# EAGLE board headstage (EAGLE 6.5.0), part 1 of 2
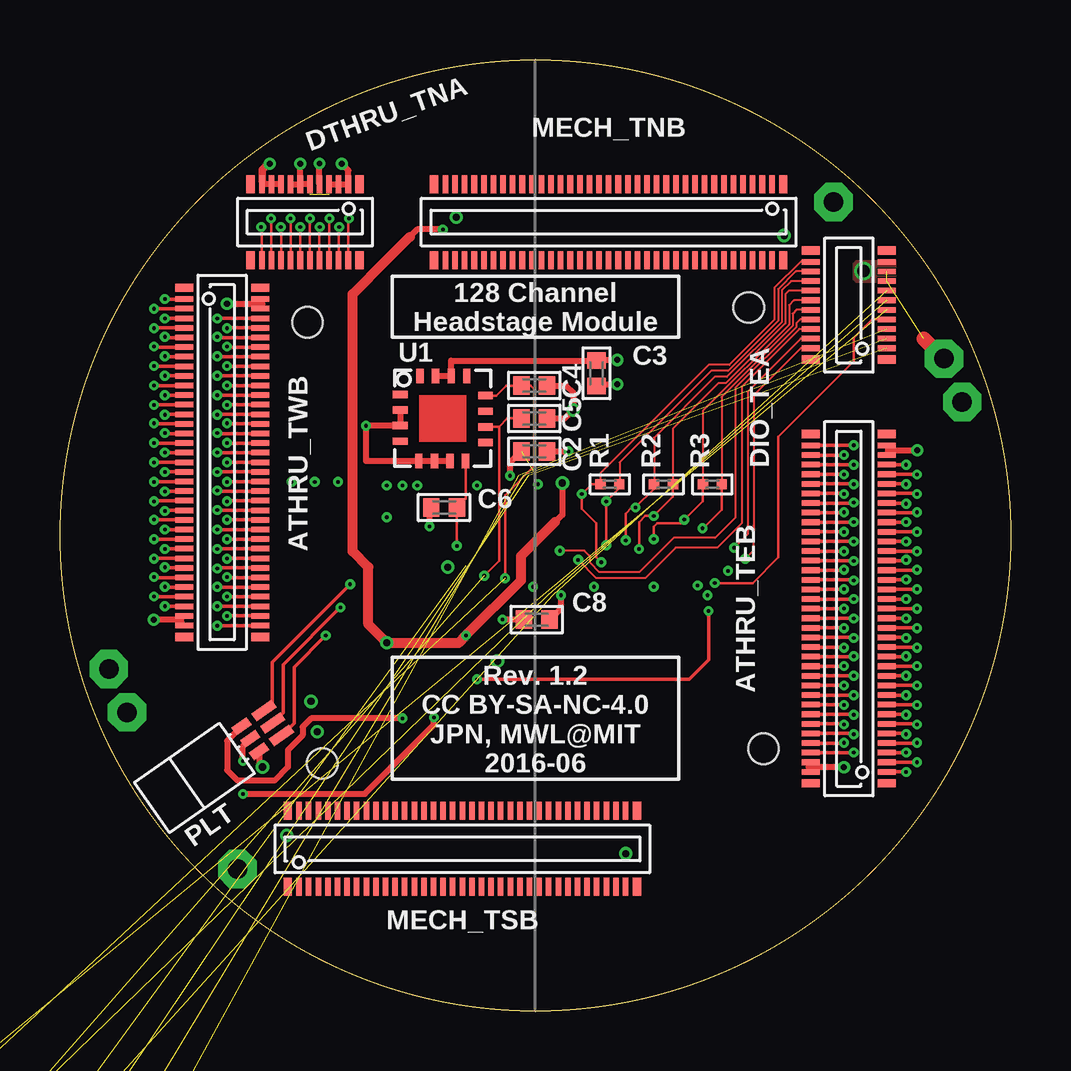
[diagram p0: board, top side]
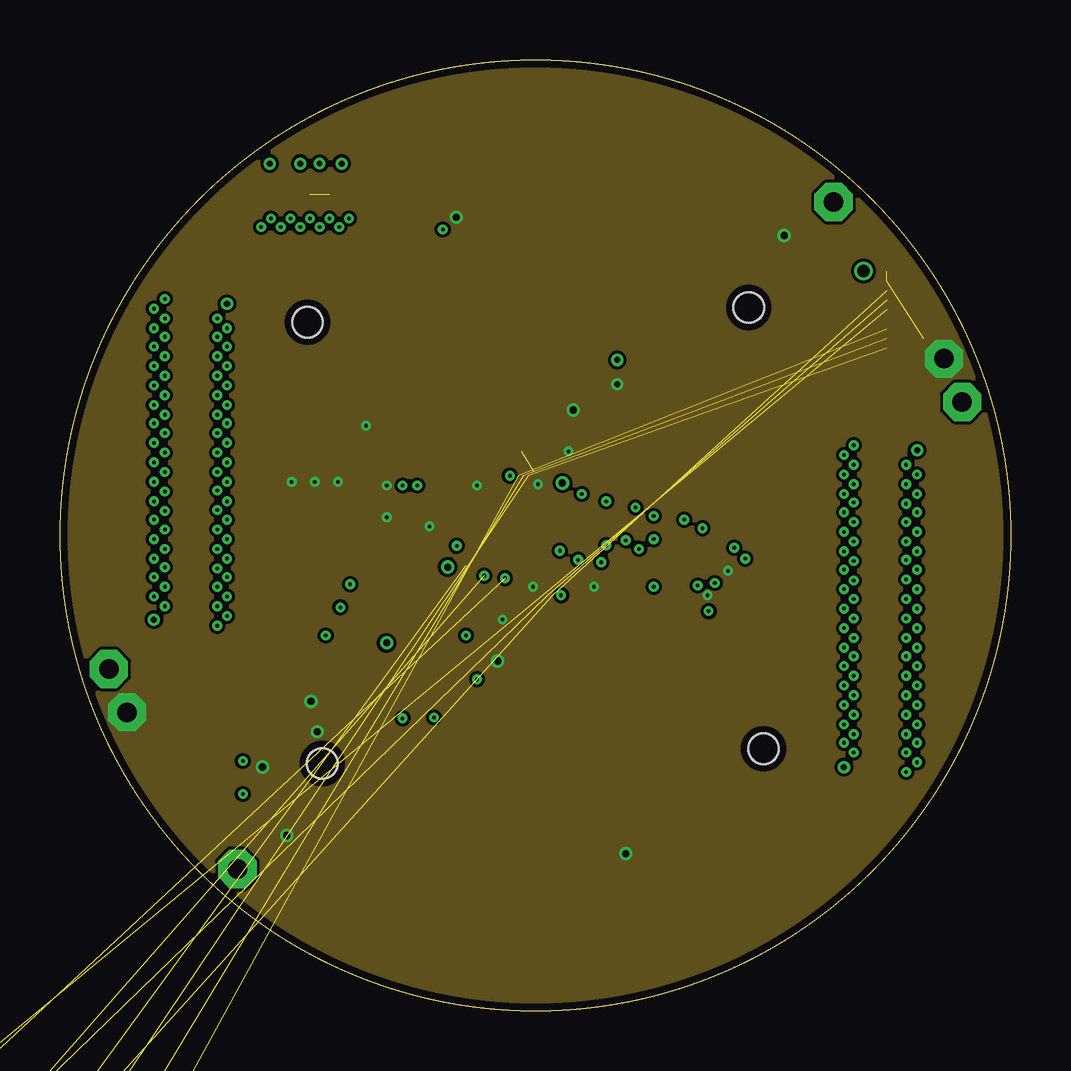
[diagram p1: board, inner layer Route2]
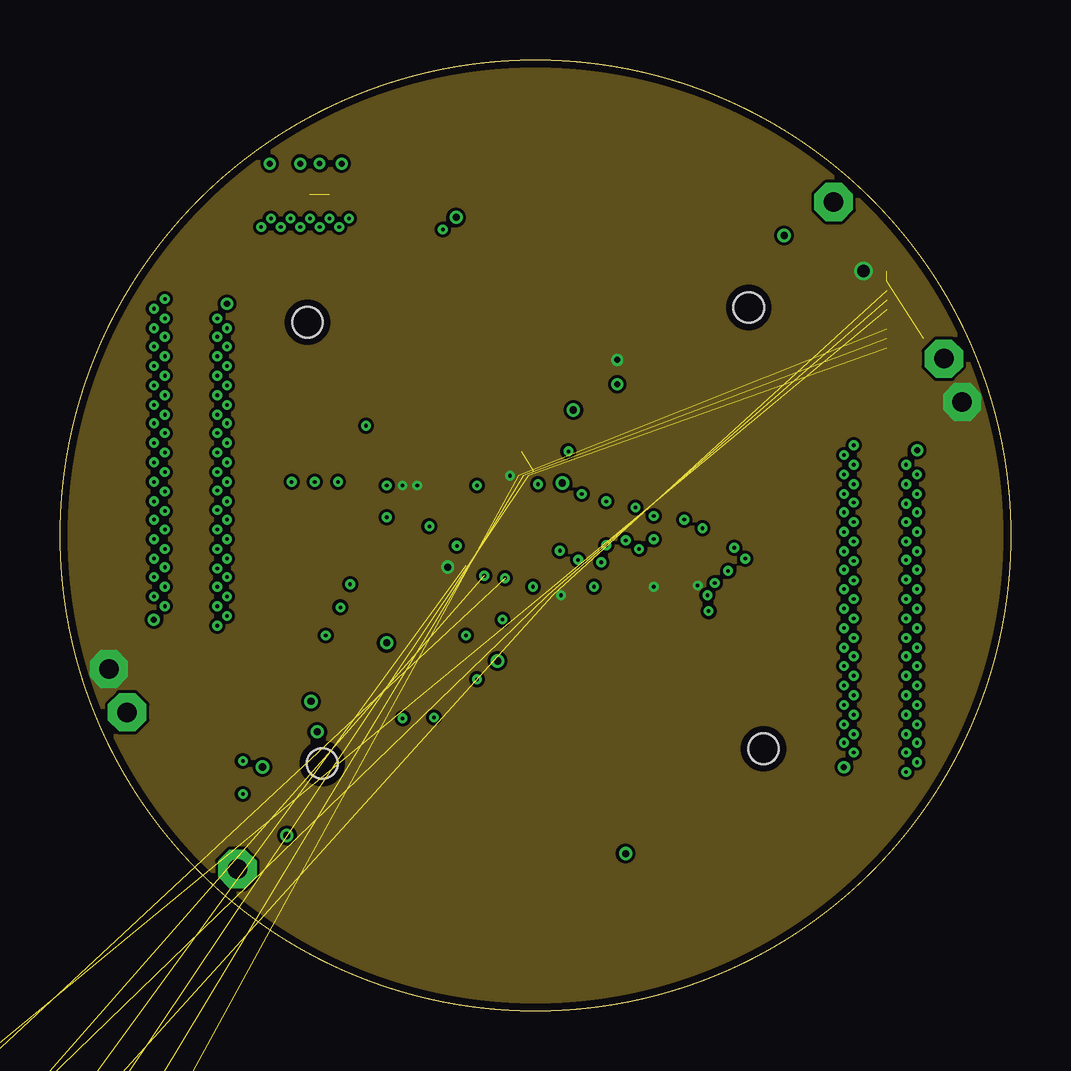
[diagram p2: board, inner layer Route3]
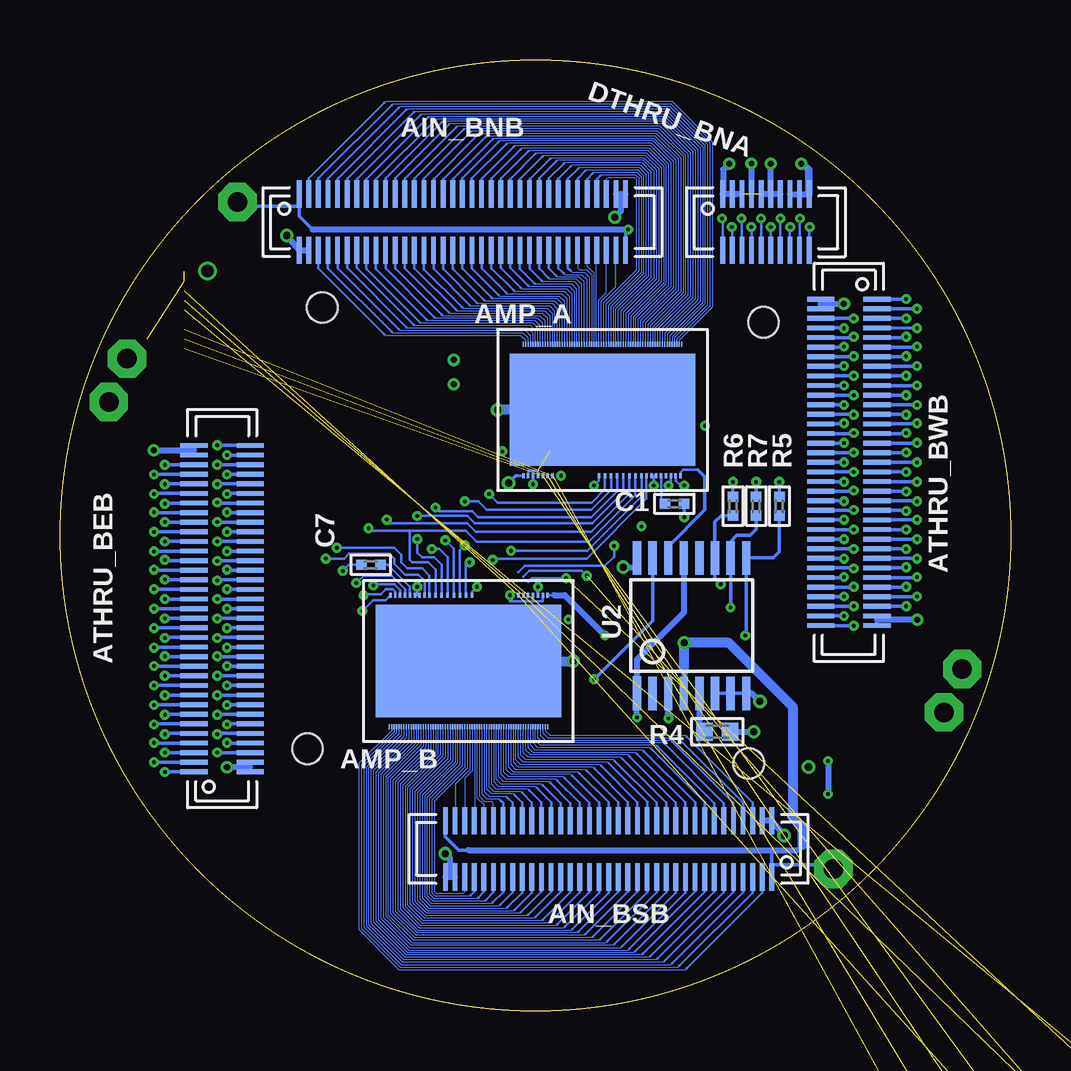
[diagram p3: board, bottom side, seen from below]

Size 39.62 x 39.62 mm. Coordinates in mm from the lower left corner, seen from the top.
Outline: circle at 19.81,19.81 radius 19.81
Copper layers (1*2+3*16): Top 0.035mm / dielectric 1.5mm / Route2 0.035mm / dielectric 0.15mm / Route3 0.035mm / dielectric 0.2mm / Bottom 0.035mm
Design rules "Precision-Image": minimum track width 2mil, minimum drill 6mil, track to track 2mil, track to pad 2mil, pad to pad 2mil, via to via 2mil, smd to smd 2mil, copper to edge 12mil, drill to drill 15mil, minimum pad ring 5mil, minimum via ring 5mil, stop-mask expansion 2mil, vias tented up to drill 20mil, thermal gap 10mil
Net classes: 1 thick: width 0.102 mm
Holes 1.27 mm at 10.31,28.7 28.7,29.31 29.31,10.92 10.92,10.31

## Footprints (pad centres in the part's own frame; a part is rotated, then mirrored left to right if it is on the bottom)
DF40-70REC = smd 0.2 x 1.14: 1 -6.8,1.17; 2 -6.4,1.17; 3 -6,1.17; 4 -5.6,1.17; 5 -5.2,1.17; 6 -4.8,1.17; 7 -4.4,1.17; 8 -4,1.17; 9 -3.6,1.17; 10 -3.2,1.17; 11 -2.8,1.17; 12 -2.4,1.17; 13 -2,1.17; 14 -1.6,1.17; 15 -1.2,1.17; 16 -0.8,1.17; 17 -0.4,1.17; 18 0,1.17; 19 0.4,1.17; 20 0.8,1.17; 21 1.2,1.17; 22 1.6,1.17; 23 2,1.17; 24 2.4,1.17; 25 2.8,1.17; 26 3.2,1.17; 27 3.6,1.17; 28 4,1.17; 29 4.4,1.17; 30 4.8,1.17; 31 5.2,1.17; 32 5.6,1.17; 33 6,1.17; 34 6.4,1.17; 35 6.8,1.17; 36 6.8,-1.17; 37 6.4,-1.17; 38 6,-1.17; 39 5.6,-1.17; 40 5.2,-1.17; 41 4.8,-1.17; 42 4.4,-1.17; 43 4,-1.17; 44 3.6,-1.17; 45 3.2,-1.17; 46 2.8,-1.17; 47 2.4,-1.17; 48 2,-1.17; 49 1.6,-1.17; 50 1.2,-1.17; 51 0.8,-1.17; 52 0.4,-1.17; 53 0,-1.17; 54 -0.4,-1.17; 55 -0.8,-1.17; 56 -1.2,-1.17; 57 -1.6,-1.17; 58 -2,-1.17; 59 -2.4,-1.17; 60 -2.8,-1.17; 61 -3.2,-1.17; 62 -3.6,-1.17; 63 -4,-1.17; 64 -4.4,-1.17; 65 -4.8,-1.17; 66 -5.2,-1.17; 67 -5.6,-1.17; 68 -6,-1.17; 69 -6.4,-1.17; 70 -6.8,-1.17
RHD2164_COB = smd 0.051 x 0.203: 0 -3.2,2.743; 1 -3.099,2.743; 2 -2.997,2.743; 3 -2.896,2.743; 4 -2.794,2.743; 5 -2.692,2.743; 6 -2.591,2.743; 7 -2.489,2.743; 8 -2.388,2.743; 9 -2.286,2.743; 10 -2.184,2.743; 11 -2.083,2.743; 12 -1.981,2.743; 13 -1.88,2.743; 14 -1.778,2.743; 15 -1.676,2.743; 16 -1.575,2.743; 17 -1.473,2.743; 18 -1.372,2.743; 19 -1.27,2.743; 20 -1.168,2.743; 21 -1.067,2.743; 22 -0.965,2.743; 23 -0.864,2.743; 24 -0.762,2.743; 25 -0.66,2.743; 26 -0.559,2.743; 27 -0.457,2.743; 28 -0.356,2.743; 29 -0.254,2.743; 30 -0.152,2.743; 31 -0.051,2.743; 32 0.051,2.743; 33 0.152,2.743; 34 0.254,2.743; 35 0.356,2.743; 36 0.457,2.743; 37 0.559,2.743; 38 0.66,2.743; 39 0.762,2.743; 40 0.864,2.743; 41 0.965,2.743; 42 1.067,2.743; 43 1.168,2.743; 44 1.27,2.743; 45 1.372,2.743; 46 1.473,2.743; 47 1.575,2.743; 48 1.676,2.743; 49 1.778,2.743; 50 1.88,2.743; 51 1.981,2.743; 52 2.083,2.743; 53 2.184,2.743; 54 2.286,2.743; 55 2.388,2.743; 56 2.489,2.743; 57 2.591,2.743; 58 2.692,2.743; 59 2.794,2.743; 60 2.896,2.743; 61 2.997,2.743; 62 3.099,2.743; 63 3.2,2.743; A -3.302,2.743; B 3.302,2.743 | smd 0.102 x 0.203: B1 -3.302,-2.743; B2 -3.099,-2.743; B3 -2.896,-2.743; B4 -2.692,-2.743; B5 -2.489,-2.743; B6 -2.286,-2.743; B7 -2.083,-2.743; B8 -0.152,-2.743; B9 0.102,-2.743; B10 0.356,-2.743; B11 0.61,-2.743; B12 0.864,-2.743; B13 1.118,-2.743; B14 1.372,-2.743; B15 1.626,-2.743; B16 1.829,-2.743; B17 2.032,-2.743; B18 2.235,-2.743; B19 2.438,-2.743; B20 2.642,-2.743; B21 2.845,-2.743; B22 3.048,-2.743; B23 3.251,-2.743 | smd 7.722 x 4.674: CENTER 0,0
DF40-70HEAD = smd 0.23 x 0.75: 1 -6.8,-1.585; 2 -6.4,-1.585; 3 -6,-1.585; 4 -5.6,-1.585; 5 -5.2,-1.585; 6 -4.8,-1.585; 7 -4.4,-1.585; 8 -4,-1.585; 9 -3.6,-1.585; 10 -3.2,-1.585; 11 -2.8,-1.585; 12 -2.4,-1.585; 13 -2,-1.585; 14 -1.6,-1.585; 15 -1.2,-1.585; 16 -0.8,-1.585; 17 -0.4,-1.585; 18 0,-1.585; 19 0.4,-1.585; 20 0.8,-1.585; 21 1.2,-1.585; 22 1.6,-1.585; 23 2,-1.585; 24 2.4,-1.585; 25 2.8,-1.585; 26 3.2,-1.585; 27 3.6,-1.585; 28 4,-1.585; 29 4.4,-1.585; 30 4.8,-1.585; 31 5.2,-1.585; 32 5.6,-1.585; 33 6,-1.585; 34 6.4,-1.585; 35 6.8,-1.585; 36 6.8,1.585; 37 6.4,1.585; 38 6,1.585; 39 5.6,1.585; 40 5.2,1.585; 41 4.8,1.585; 42 4.4,1.585; 43 4,1.585; 44 3.6,1.585; 45 3.2,1.585; 46 2.8,1.585; 47 2.4,1.585; 48 2,1.585; 49 1.6,1.585; 50 1.2,1.585; 51 0.8,1.585; 52 0.4,1.585; 53 0,1.585; 54 -0.4,1.585; 55 -0.8,1.585; 56 -1.2,1.585; 57 -1.6,1.585; 58 -2,1.585; 59 -2.4,1.585; 60 -2.8,1.585; 61 -3.2,1.585; 62 -3.6,1.585; 63 -4,1.585; 64 -4.4,1.585; 65 -4.8,1.585; 66 -5.2,1.585; 67 -5.6,1.585; 68 -6,1.585; 69 -6.4,1.585; 70 -6.8,1.585 | smd 0.35 x 0.75: M1 -7.275,-1.585; M2 7.275,-1.585; M3 7.275,1.585; M4 -7.275,1.585
0201 = smd 0.432 x 0.432: 1 -0.394,0; 2 0.394,0
0402 = smd 0.686 x 0.762: 1 -0.533,0; 2 0.533,0
DF40-20HEAD = smd 0.23 x 0.75: 1 -1.8,-1.585; 2 -1.4,-1.585; 3 -1,-1.585; 4 -0.6,-1.585; 5 -0.2,-1.585; 6 0.2,-1.585; 7 0.6,-1.585; 8 1,-1.585; 9 1.4,-1.585; 10 1.8,-1.585; 11 1.8,1.585; 12 1.4,1.585; 13 1,1.585; 14 0.6,1.585; 15 0.2,1.585; 16 -0.2,1.585; 17 -0.6,1.585; 18 -1,1.585; 19 -1.4,1.585; 20 -1.8,1.585 | smd 0.35 x 0.75: M1 -2.275,-1.585; M2 2.275,-1.585; M3 2.275,1.585; M4 -2.275,1.585
DF40-20REC = smd 0.2 x 1.14: 1 -1.8,1.17; 2 -1.4,1.17; 3 -1,1.17; 4 -0.6,1.17; 5 -0.2,1.17; 6 0.2,1.17; 7 0.6,1.17; 8 1,1.17; 9 1.4,1.17; 10 1.8,1.17; 11 1.8,-1.17; 12 1.4,-1.17; 13 1,-1.17; 14 0.6,-1.17; 15 0.2,-1.17; 16 -0.2,-1.17; 17 -0.6,-1.17; 18 -1,-1.17; 19 -1.4,-1.17; 20 -1.8,-1.17
TESTPOINT_SMALL = drill 0.813 pad 1.6 octagon: 1 0,0
OMNETICS_PZN-06-AA = smd 0.381 x 0.762: B1 0.635,-1.016; B2 0,-1.016; B3 -0.635,-1.016 | smd 0.381 x 1.016: T1 0.635,-2.159; T2 0,-2.159; T3 -0.635,-2.159
ADXL335 = smd 0.61 x 0.305: COM1 -1.775,-0.3; NC1 -1.775,1; NC2 -1.775,-0.95; NC3 1.775,-1; NC4 1.775,0.3; ST -1.775,0.35; XOUT 1.775,0.95; YOUT 1.775,-0.35 | smd 0.305 x 0.61: COM2 -1,-1.775; COM3 -0.35,-1.775; COM4 0.3,-1.775; NC5 1,1.775; NC6 -0.95,1.775; VS1 0.35,1.775; VS2 -0.3,1.775; ZOUT 0.95,-1.775
TSSOP-16 = smd 0.348 x 1.397: 1 -2.273,-2.814; 2 -1.623,-2.815; 3 -0.973,-2.815; 4 -0.323,-2.815; 5 0.327,-2.815; 6 0.977,-2.815; 7 1.627,-2.815; 8 2.277,-2.815; 9 2.277,2.825; 10 1.627,2.825; 11 0.977,2.825; 12 0.327,2.825; 13 -0.323,2.825; 14 -0.973,2.825; 15 -1.623,2.825; 16 -2.273,2.825

## Placement (x,y rotation side)
AIN_BNB  DF40REC  [DF40-70REC]  22.86,32.87 0 bottom
AIN_BSB  DF40REC  [DF40-70REC]  16.76,6.76 180 bottom
AMP_A  RHD2164  [RHD2164_COB]  17.02,25.04 0 bottom
AMP_B  RHD2164  [RHD2164_COB]  22.61,14.58 180 bottom
ATHRU_BEB  DF40REC  [DF40-70REC]  32.87,16.76 90 bottom
ATHRU_BWB  DF40REC  [DF40-70REC]  6.76,22.86 270 bottom
ATHRU_TEB  DF40HEAD  [DF40-70HEAD]  32.87,16.76 90 top
ATHRU_TWB  DF40HEAD  [DF40-70HEAD]  6.76,22.86 270 top
C1  10n  [0201]  14.02,21.13 0 bottom
C2  .1uF  [0402]  19.76,23.32 0 top
C3  .1uF  [0402]  22.35,26.57 270 top
C4  .1uF  [0402]  19.76,26.06 180 top
C5  .1uF  [0402]  19.76,24.69 180 top
C6  .1uF  [0402]  16,20.98 0 top
C7  10n  [0201]  26.67,18.59 180 bottom
C8  .1uF  [0402]  19.86,16.31 180 top
DIO_TEA  DF40HEAD  [DF40-20HEAD]  32.87,29.41 90 top
DTHRU_BNA  DF40REC  [DF40-20REC]  10.21,32.87 0 bottom
DTHRU_TNA  DF40HEAD  [DF40-20HEAD]  10.21,32.87 180 top
GND  GND  [TESTPOINT_SMALL]  36.83,27.18 0 top
GND.  GND  [TESTPOINT_SMALL]  2.79,12.45 0 top
MECH_TNB  DF40HEAD  [DF40-70HEAD]  22.86,32.87 180 top
MECH_TSB  DF40HEAD  [DF40-70HEAD]  16.76,6.76 0 top
PLT  PZN-06  [OMNETICS_PZN-06-AA]  7.1,10.75 125 top
R1  100  [0201]  22.91,21.95 0 top
R2  100  [0201]  25.15,21.95 0 top
R3  100  [0201]  27.18,21.95 0 top
R4  0  [0402]  12.24,11.63 180 bottom
R5  100k  [0201]  9.65,21.03 270 bottom
R6  100k  [0201]  10.62,21.03 270 bottom
R7  100k  [0201]  11.58,21.03 270 bottom
R8  0  [0201]  -6.81,-5.18 0 top  (outside the outline)
R9  0  [0201]  -6.81,-9.3 0 top  (outside the outline)
R10  0  [0201]  -6.81,-13.41 0 top  (outside the outline)
R11  0  [0201]  -6.81,-17.53 0 top  (outside the outline)
R12  0  [0201]  -6.81,-21.64 0 top  (outside the outline)
R13  0  [0201]  -6.81,-25.76 0 top  (outside the outline)
REF1  REF  [TESTPOINT_SMALL]  7.39,5.92 0 top
REF2  REF  [TESTPOINT_SMALL]  32.23,33.71 0 top
U1  ADXL335  [ADXL335]  15.95,24.69 0 top
U2  74HC4053  [TSSOP-16]  13.31,16.05 0 bottom
VCC1  VCC  [TESTPOINT_SMALL]  37.59,25.37 0 top
VCC2  VCC  [TESTPOINT_SMALL]  2.03,14.25 0 top

## Library data of the parts
AIN_BNB AIN_BSB AMP_A AMP_B ATHRU_BEB ATHRU_BWB ATHRU_TEB ATHRU_TWB C4-C6 DIO_TEA DTHRU_BNA DTHRU_TNA GND GND. MECH_TNB MECH_TSB PLT R1-R3 R8-R13 REF1 REF2 U1 U2 VCC1 VCC2 = jonnew
C1 C2 C7 C8 R4-R7 = RHD2000_eval_board
C3 = headstage

## Nets
AGND_THRU_1: ATHRU_BWB.34 ATHRU_BWB.35 ATHRU_TWB.34 ATHRU_TWB.35
AGND_THRU_2: ATHRU_BWB.69 ATHRU_BWB.70 ATHRU_TWB.69 ATHRU_TWB.70
AGND_THRU_3 [thick]: ATHRU_BEB.34 ATHRU_BEB.35 ATHRU_TEB.34 ATHRU_TEB.35
AGND_THRU_4: ATHRU_BEB.69 ATHRU_BEB.70 ATHRU_TEB.69 ATHRU_TEB.70
AUXIN1_A: AMP_A.B5 DIO_TEA.1 R11.1
AUXIN1_B: AMP_B.B5 DIO_TEA.5 R8.1
AUXIN2_A: AMP_A.B6 DIO_TEA.2 R12.1
AUXIN2_B: AMP_B.B6 DIO_TEA.6 R9.1
AUXIN3_A: AMP_A.B7 DIO_TEA.3 R13.1
AUXIN3_B: AMP_B.B7 DIO_TEA.7 R10.1
AUXOUT_B: AMP_B.B20 DIO_TEA.4
AUXOUT_B_THRU: DTHRU_BNA.4 DTHRU_TNA.4
BATH [thick]: PLT.B1 U2.3
CS+: AMP_A.B10 AMP_B.B10 DIO_TEA.12 R1.2
CS+_THRU: DTHRU_BNA.12 DTHRU_TNA.12
CS-: AMP_A.B9 AMP_B.B9 DIO_TEA.11 R1.1
CS-_THRU: DTHRU_BNA.11 DTHRU_TNA.11
DGND_THRU: DTHRU_BNA.1 DTHRU_BNA.2 DTHRU_BNA.3 DTHRU_BNA.5 DTHRU_BNA.6 DTHRU_BNA.7 DTHRU_TNA.1 DTHRU_TNA.2 DTHRU_TNA.3 DTHRU_TNA.5 DTHRU_TNA.6 DTHRU_TNA.7
ELEC_TEST1: AMP_A.B23 U2.14
ELEC_TEST2: AMP_B.B23 U2.15
GND [thick]: AIN_BNB.34 AIN_BNB.35 AIN_BNB.69 AIN_BNB.70 AIN_BSB.34 AIN_BSB.35 AIN_BSB.69 AIN_BSB.70 AMP_A.B3 AMP_A.B8 AMP_A.B22 AMP_A.CENTER AMP_B.B3 AMP_B.B8 AMP_B.B22 AMP_B.CENTER C1.2 C2.2 C3.2 C4.1 C5.1 C6.1 C7.2 C8.2 DIO_TEA.8 DIO_TEA.9 GND.1 GND..1 PLT.B3 R4.1 R5.1 R6.1 R7.1 U1.COM1 U1.COM2 U1.COM3 U1.COM4 U1.ST U2.6 U2.7 U2.8
MISO1+: AMP_A.B16 DIO_TEA.18
MISO1+_THRU: DTHRU_BNA.18 DTHRU_TNA.18
MISO1-: AMP_A.B15 DIO_TEA.17
MISO1-_THRU: DTHRU_BNA.17 DTHRU_TNA.17
MISO2+: AMP_B.B16 DIO_TEA.20
MISO2+_THRU: DTHRU_BNA.20 DTHRU_TNA.20
MISO2-: AMP_B.B15 DIO_TEA.19
MISO2-_THRU: DTHRU_BNA.19 DTHRU_TNA.19
MOSI+: AMP_A.B14 AMP_B.B14 DIO_TEA.16 R3.2
MOSI+_THRU: DTHRU_BNA.16 DTHRU_TNA.16
MOSI-: AMP_A.B13 AMP_B.B13 DIO_TEA.15 R3.1
MOSI-_THRU: DTHRU_BNA.15 DTHRU_TNA.15
N$1 [thick]: AMP_B.B19 C7.1
N$2: AIN_BNB.38 AMP_A.30
N$3: AIN_BNB.39 AMP_A.29
N$4: AIN_BNB.40 AMP_A.28
N$5: AIN_BNB.41 AMP_A.27
N$6: AIN_BNB.42 AMP_A.26
N$7: AIN_BNB.32 AMP_A.33
N$8: AIN_BNB.31 AMP_A.34
N$9: AIN_BNB.30 AMP_A.35
N$10: AIN_BNB.29 AMP_A.36
N$11: AIN_BSB.38 AMP_B.30
N$12: AIN_BNB.28 AMP_A.37
N$13: AIN_BNB.27 AMP_A.38
N$14: AIN_BNB.26 AMP_A.39
N$15: AIN_BNB.25 AMP_A.40
N$16: AIN_BNB.24 AMP_A.41
N$17: AIN_BNB.23 AMP_A.42
N$18: AIN_BNB.22 AMP_A.43
N$19: AIN_BNB.21 AMP_A.44
N$20: AIN_BNB.20 AMP_A.45
N$21: AIN_BNB.19 AMP_A.46
N$22: AIN_BNB.18 AMP_A.47
N$23: AIN_BNB.17 AMP_A.48
N$24: AIN_BNB.16 AMP_A.49
N$25: AIN_BNB.15 AMP_A.50
N$26: AIN_BNB.14 AMP_A.51
N$27: AIN_BNB.13 AMP_A.52
N$28: AIN_BNB.12 AMP_A.53
N$29: AIN_BNB.11 AMP_A.54
N$30: AIN_BNB.10 AMP_A.55
N$31: AIN_BNB.9 AMP_A.56
N$32: AIN_BNB.8 AMP_A.57
N$33: AIN_BNB.7 AMP_A.58
N$34: AIN_BNB.6 AMP_A.59
N$35: AIN_BSB.39 AMP_B.29
N$36: AIN_BSB.40 AMP_B.28
N$37: AIN_BSB.41 AMP_B.27
N$38: AIN_BSB.42 AMP_B.26
N$39: AIN_BSB.43 AMP_B.25
N$40: AIN_BSB.44 AMP_B.24
N$41: AIN_BNB.5 AMP_A.60
N$42 [thick]: AMP_A.B19 C1.1
N$43: AIN_BNB.4 AMP_A.61
N$44: AIN_BNB.3 AMP_A.62
N$45: AIN_BNB.2 AMP_A.63
N$46: AIN_BNB.33 AMP_A.32
N$47: AIN_BSB.45 AMP_B.23
N$48: AIN_BSB.46 AMP_B.22
N$49: AIN_BSB.47 AMP_B.21
N$50: AIN_BSB.48 AMP_B.20
N$51: AIN_BSB.49 AMP_B.19
N$52: AIN_BSB.50 AMP_B.18
N$53: AIN_BSB.51 AMP_B.17
N$54: AIN_BSB.52 AMP_B.16
N$55: AIN_BSB.53 AMP_B.15
N$56: AIN_BSB.54 AMP_B.14
N$57: AIN_BSB.55 AMP_B.13
N$58: AIN_BSB.56 AMP_B.12
N$59: AIN_BSB.57 AMP_B.11
N$60: AIN_BSB.58 AMP_B.10
N$61: AIN_BSB.59 AMP_B.9
N$62: AIN_BSB.60 AMP_B.8
N$63: AIN_BSB.61 AMP_B.7
N$64: AIN_BSB.62 AMP_B.6
N$65: AIN_BSB.63 AMP_B.5
N$66: AIN_BSB.64 AMP_B.4
N$67: AIN_BSB.65 AMP_B.3
N$68: AIN_BSB.66 AMP_B.2
N$69: AIN_BSB.67 AMP_B.1
N$70: AIN_BNB.43 AMP_A.25
N$71: AIN_BNB.44 AMP_A.24
N$72: AIN_BNB.45 AMP_A.23
N$73: AIN_BNB.46 AMP_A.22
N$74: AIN_BSB.68 AMP_B.0
N$75: AIN_BSB.37 AMP_B.31
N$76: AIN_BSB.32 AMP_B.33
N$77: AIN_BSB.31 AMP_B.34
N$78: AIN_BSB.30 AMP_B.35
N$79: AIN_BSB.29 AMP_B.36
N$80: AIN_BSB.28 AMP_B.37
N$81: AIN_BSB.27 AMP_B.38
N$82: AIN_BSB.26 AMP_B.39
N$83: AIN_BSB.25 AMP_B.40
N$84: AIN_BSB.24 AMP_B.41
N$85: AIN_BSB.23 AMP_B.42
N$86: AIN_BSB.22 AMP_B.43
N$87: AIN_BSB.21 AMP_B.44
N$88: AIN_BSB.20 AMP_B.45
N$89: AIN_BSB.19 AMP_B.46
N$90: AIN_BSB.18 AMP_B.47
N$91: AIN_BSB.17 AMP_B.48
N$92: AIN_BSB.16 AMP_B.49
N$93: AIN_BSB.15 AMP_B.50
N$94: AIN_BSB.14 AMP_B.51
N$95: AIN_BSB.13 AMP_B.52
N$96: AIN_BSB.12 AMP_B.53
N$97: AIN_BSB.11 AMP_B.54
N$98: AIN_BSB.10 AMP_B.55
N$99: AIN_BSB.9 AMP_B.56
N$100: AIN_BSB.8 AMP_B.57
N$101: AIN_BSB.7 AMP_B.58
N$102: AIN_BSB.6 AMP_B.59
N$103: AIN_BSB.5 AMP_B.60
N$104: AIN_BSB.4 AMP_B.61
N$105: AIN_BSB.3 AMP_B.62
N$106: AIN_BSB.2 AMP_B.63
N$107: AIN_BSB.33 AMP_B.32
N$108: ATHRU_BEB.33 ATHRU_TEB.33
N$109: ATHRU_BEB.32 ATHRU_TEB.32
N$110: ATHRU_BEB.31 ATHRU_TEB.31
N$111: ATHRU_BEB.30 ATHRU_TEB.30
N$112: ATHRU_BEB.29 ATHRU_TEB.29
N$113: ATHRU_BEB.28 ATHRU_TEB.28
N$114: ATHRU_BEB.27 ATHRU_TEB.27
N$115: ATHRU_BEB.26 ATHRU_TEB.26
N$116: ATHRU_BEB.25 ATHRU_TEB.25
N$117: ATHRU_BEB.24 ATHRU_TEB.24
N$118: ATHRU_BEB.23 ATHRU_TEB.23
N$119: ATHRU_BEB.22 ATHRU_TEB.22
N$120: ATHRU_BEB.21 ATHRU_TEB.21
N$121: ATHRU_BEB.20 ATHRU_TEB.20
N$122: ATHRU_BEB.19 ATHRU_TEB.19
N$123: ATHRU_BEB.18 ATHRU_TEB.18
N$124: ATHRU_BEB.17 ATHRU_TEB.17
N$125: ATHRU_BEB.16 ATHRU_TEB.16
N$126: ATHRU_BEB.15 ATHRU_TEB.15
N$127: ATHRU_BEB.14 ATHRU_TEB.14
N$128: ATHRU_BEB.13 ATHRU_TEB.13
N$129: ATHRU_BEB.12 ATHRU_TEB.12
N$130: ATHRU_BEB.11 ATHRU_TEB.11
N$131: PLT.T1 R7.2 U2.11
N$132: PLT.T2 R6.2 U2.10
N$133: PLT.T3 R5.2 U2.9
N$134 [thick]: R4.2 U2.5
N$136: PLT.B2 U2.1 U2.13
N$137: AIN_BNB.47 AMP_A.21
N$138: AIN_BNB.48 AMP_A.20
N$139: AIN_BNB.49 AMP_A.19
N$140: AIN_BNB.50 AMP_A.18
N$141: AIN_BNB.51 AMP_A.17
N$142: AIN_BNB.52 AMP_A.16
N$143: AIN_BNB.53 AMP_A.15
N$144: AIN_BNB.54 AMP_A.14
N$145: AIN_BNB.55 AMP_A.13
N$146: AIN_BNB.56 AMP_A.12
N$147: AIN_BNB.57 AMP_A.11
N$148: AIN_BNB.58 AMP_A.10
N$149: AIN_BNB.59 AMP_A.9
N$150: AIN_BNB.60 AMP_A.8
N$151: AIN_BNB.61 AMP_A.7
N$152: AIN_BNB.62 AMP_A.6
N$153: AIN_BNB.63 AMP_A.5
N$154: AIN_BNB.64 AMP_A.4
N$155: AIN_BNB.65 AMP_A.3
N$156: AIN_BNB.66 AMP_A.2
N$157: ATHRU_BEB.10 ATHRU_TEB.10
N$158: ATHRU_BEB.9 ATHRU_TEB.9
N$159: ATHRU_BEB.8 ATHRU_TEB.8
N$160: ATHRU_BEB.7 ATHRU_TEB.7
N$161: ATHRU_BEB.6 ATHRU_TEB.6
N$162: AIN_BNB.37 AMP_A.31
N$163: ATHRU_BEB.5 ATHRU_TEB.5
N$164: ATHRU_BEB.4 ATHRU_TEB.4
N$165: ATHRU_BEB.3 ATHRU_TEB.3
N$166: ATHRU_BEB.2 ATHRU_TEB.2
N$167: ATHRU_BEB.38 ATHRU_TEB.38
N$168: ATHRU_BEB.39 ATHRU_TEB.39
N$169: ATHRU_BEB.40 ATHRU_TEB.40
N$170: ATHRU_BEB.41 ATHRU_TEB.41
N$171: ATHRU_BEB.42 ATHRU_TEB.42
N$172: ATHRU_BEB.43 ATHRU_TEB.43
N$173: ATHRU_BEB.44 ATHRU_TEB.44
N$174: ATHRU_BEB.45 ATHRU_TEB.45
N$175: ATHRU_BEB.46 ATHRU_TEB.46
N$176: ATHRU_BEB.47 ATHRU_TEB.47
N$177: ATHRU_BEB.48 ATHRU_TEB.48
N$178: ATHRU_BEB.49 ATHRU_TEB.49
N$179: ATHRU_BEB.50 ATHRU_TEB.50
N$180: ATHRU_BEB.51 ATHRU_TEB.51
N$181: ATHRU_BEB.52 ATHRU_TEB.52
N$182: ATHRU_BEB.53 ATHRU_TEB.53
N$183: ATHRU_BEB.54 ATHRU_TEB.54
N$184: ATHRU_BEB.55 ATHRU_TEB.55
N$185: ATHRU_BEB.56 ATHRU_TEB.56
N$186: ATHRU_BEB.57 ATHRU_TEB.57
N$187: ATHRU_BEB.58 ATHRU_TEB.58
N$188: ATHRU_BEB.59 ATHRU_TEB.59
N$189: ATHRU_BEB.60 ATHRU_TEB.60
N$190: ATHRU_BEB.61 ATHRU_TEB.61
N$191: ATHRU_BEB.62 ATHRU_TEB.62
N$192: ATHRU_BEB.63 ATHRU_TEB.63
N$193: ATHRU_BEB.64 ATHRU_TEB.64
N$194: ATHRU_BEB.65 ATHRU_TEB.65
N$195: ATHRU_BEB.66 ATHRU_TEB.66
N$196: ATHRU_BEB.67 ATHRU_TEB.67
N$197: ATHRU_BEB.68 ATHRU_TEB.68
N$199: ATHRU_BWB.33 ATHRU_TWB.33
N$200: ATHRU_BWB.32 ATHRU_TWB.32
N$201: ATHRU_BWB.31 ATHRU_TWB.31
N$202: ATHRU_BWB.30 ATHRU_TWB.30
N$203: ATHRU_BWB.29 ATHRU_TWB.29
N$204: ATHRU_BWB.28 ATHRU_TWB.28
N$205: ATHRU_BWB.27 ATHRU_TWB.27
N$206: ATHRU_BWB.26 ATHRU_TWB.26
N$207: ATHRU_BWB.25 ATHRU_TWB.25
N$208: ATHRU_BWB.24 ATHRU_TWB.24
N$209: ATHRU_BWB.23 ATHRU_TWB.23
N$210: ATHRU_BWB.22 ATHRU_TWB.22
N$211: ATHRU_BWB.21 ATHRU_TWB.21
N$212: ATHRU_BWB.20 ATHRU_TWB.20
N$213: ATHRU_BWB.19 ATHRU_TWB.19
N$214: ATHRU_BWB.18 ATHRU_TWB.18
N$215: ATHRU_BWB.17 ATHRU_TWB.17
N$216: ATHRU_BWB.16 ATHRU_TWB.16
N$217: ATHRU_BWB.15 ATHRU_TWB.15
N$218: ATHRU_BWB.14 ATHRU_TWB.14
N$219: ATHRU_BWB.13 ATHRU_TWB.13
N$220: ATHRU_BWB.12 ATHRU_TWB.12
N$221: ATHRU_BWB.11 ATHRU_TWB.11
N$222: ATHRU_BWB.10 ATHRU_TWB.10
N$223: ATHRU_BWB.9 ATHRU_TWB.9
N$224: ATHRU_BWB.8 ATHRU_TWB.8
N$225: ATHRU_BWB.7 ATHRU_TWB.7
N$226: ATHRU_BWB.6 ATHRU_TWB.6
N$227: ATHRU_BWB.5 ATHRU_TWB.5
N$228: ATHRU_BWB.4 ATHRU_TWB.4
N$229: ATHRU_BWB.3 ATHRU_TWB.3
N$230: ATHRU_BWB.2 ATHRU_TWB.2
N$231: ATHRU_BWB.38 ATHRU_TWB.38
N$232: ATHRU_BWB.39 ATHRU_TWB.39
N$233: ATHRU_BWB.40 ATHRU_TWB.40
N$234: ATHRU_BWB.41 ATHRU_TWB.41
N$235: ATHRU_BWB.42 ATHRU_TWB.42
N$236: ATHRU_BWB.43 ATHRU_TWB.43
N$237: ATHRU_BWB.44 ATHRU_TWB.44
N$238: ATHRU_BWB.45 ATHRU_TWB.45
N$239: ATHRU_BWB.46 ATHRU_TWB.46
N$240: ATHRU_BWB.47 ATHRU_TWB.47
N$241: ATHRU_BWB.48 ATHRU_TWB.48
N$242: ATHRU_BWB.49 ATHRU_TWB.49
N$243: ATHRU_BWB.50 ATHRU_TWB.50
N$244: ATHRU_BWB.51 ATHRU_TWB.51
N$245: ATHRU_BWB.52 ATHRU_TWB.52
N$246: ATHRU_BWB.53 ATHRU_TWB.53
N$247: ATHRU_BWB.54 ATHRU_TWB.54
N$248: ATHRU_BWB.55 ATHRU_TWB.55
N$249: ATHRU_BWB.56 ATHRU_TWB.56
N$250: ATHRU_BWB.57 ATHRU_TWB.57
N$251: ATHRU_BWB.58 ATHRU_TWB.58
N$252: ATHRU_BWB.59 ATHRU_TWB.59
N$253: ATHRU_BWB.60 ATHRU_TWB.60
N$254: ATHRU_BWB.61 ATHRU_TWB.61
N$255: ATHRU_BWB.62 ATHRU_TWB.62
N$256: ATHRU_BWB.63 ATHRU_TWB.63
N$257: ATHRU_BWB.64 ATHRU_TWB.64
N$258: ATHRU_BWB.65 ATHRU_TWB.65
N$259: ATHRU_BWB.66 ATHRU_TWB.66
N$260: ATHRU_BWB.67 ATHRU_TWB.67
N$261: ATHRU_BWB.68 ATHRU_TWB.68
N$262: ATHRU_BEB.37 ATHRU_TEB.37
N$450: AIN_BNB.68 AMP_A.0
N$451: AIN_BNB.67 AMP_A.1
N$1000: ATHRU_BWB.37 ATHRU_TWB.37
REF: AIN_BNB.1 AIN_BNB.36 AIN_BSB.1 AIN_BSB.36 AMP_A.B1 AMP_B.B1 REF1.1 REF2.1 U2.4
REF_THRU_1: ATHRU_BWB.36 ATHRU_TWB.36
REF_THRU_2: ATHRU_BWB.1 ATHRU_TWB.1
REF_THRU_3: ATHRU_BEB.36 ATHRU_TEB.36
REF_THRU_4: ATHRU_BEB.1 ATHRU_TEB.1
SCLK+: AMP_A.B12 AMP_B.B12 DIO_TEA.14 R2.2
SCLK+_THRU: DTHRU_BNA.14 DTHRU_TNA.14
SCLK-: AMP_A.B11 AMP_B.B11 DIO_TEA.13 R2.1
SCLK-_THRU: DTHRU_BNA.13 DTHRU_TNA.13
VCC [thick]: AMP_A.B2 AMP_A.B4 AMP_A.B17 AMP_A.B18 AMP_A.B21 AMP_B.B2 AMP_B.B4 AMP_B.B17 AMP_B.B18 AMP_B.B21 C2.1 C3.1 C8.1 DIO_TEA.10 U1.VS1 U1.VS2 U2.16 VCC1.1 VCC2.1
VDD_THRU: DTHRU_BNA.8 DTHRU_BNA.9 DTHRU_BNA.10 DTHRU_TNA.8 DTHRU_TNA.9 DTHRU_TNA.10
XOUT1: C4.2 R8.2 U1.XOUT
XOUT2: R11.2
YOUT1: C5.2 R9.2 U1.YOUT
YOUT2: R12.2
ZOUT1: C6.2 R10.2 U1.ZOUT
ZOUT2: R13.2